# Altium PCB EXP_V111.PcbDoc (part 2 of 4)
Units mm, origin at the board's own origin, x right, y up, seen from the top; angles counter-clockwise.
Board outline 86 x 86 mm, 4 copper layers (Top Layer, Mid-Layer 1, Mid-Layer 2, Bottom Layer), stack 1.584 mm thick; 341 components, 287 nets, 1185 pads, 999 vias.
Unrouted connection lines stored in the file: 255.
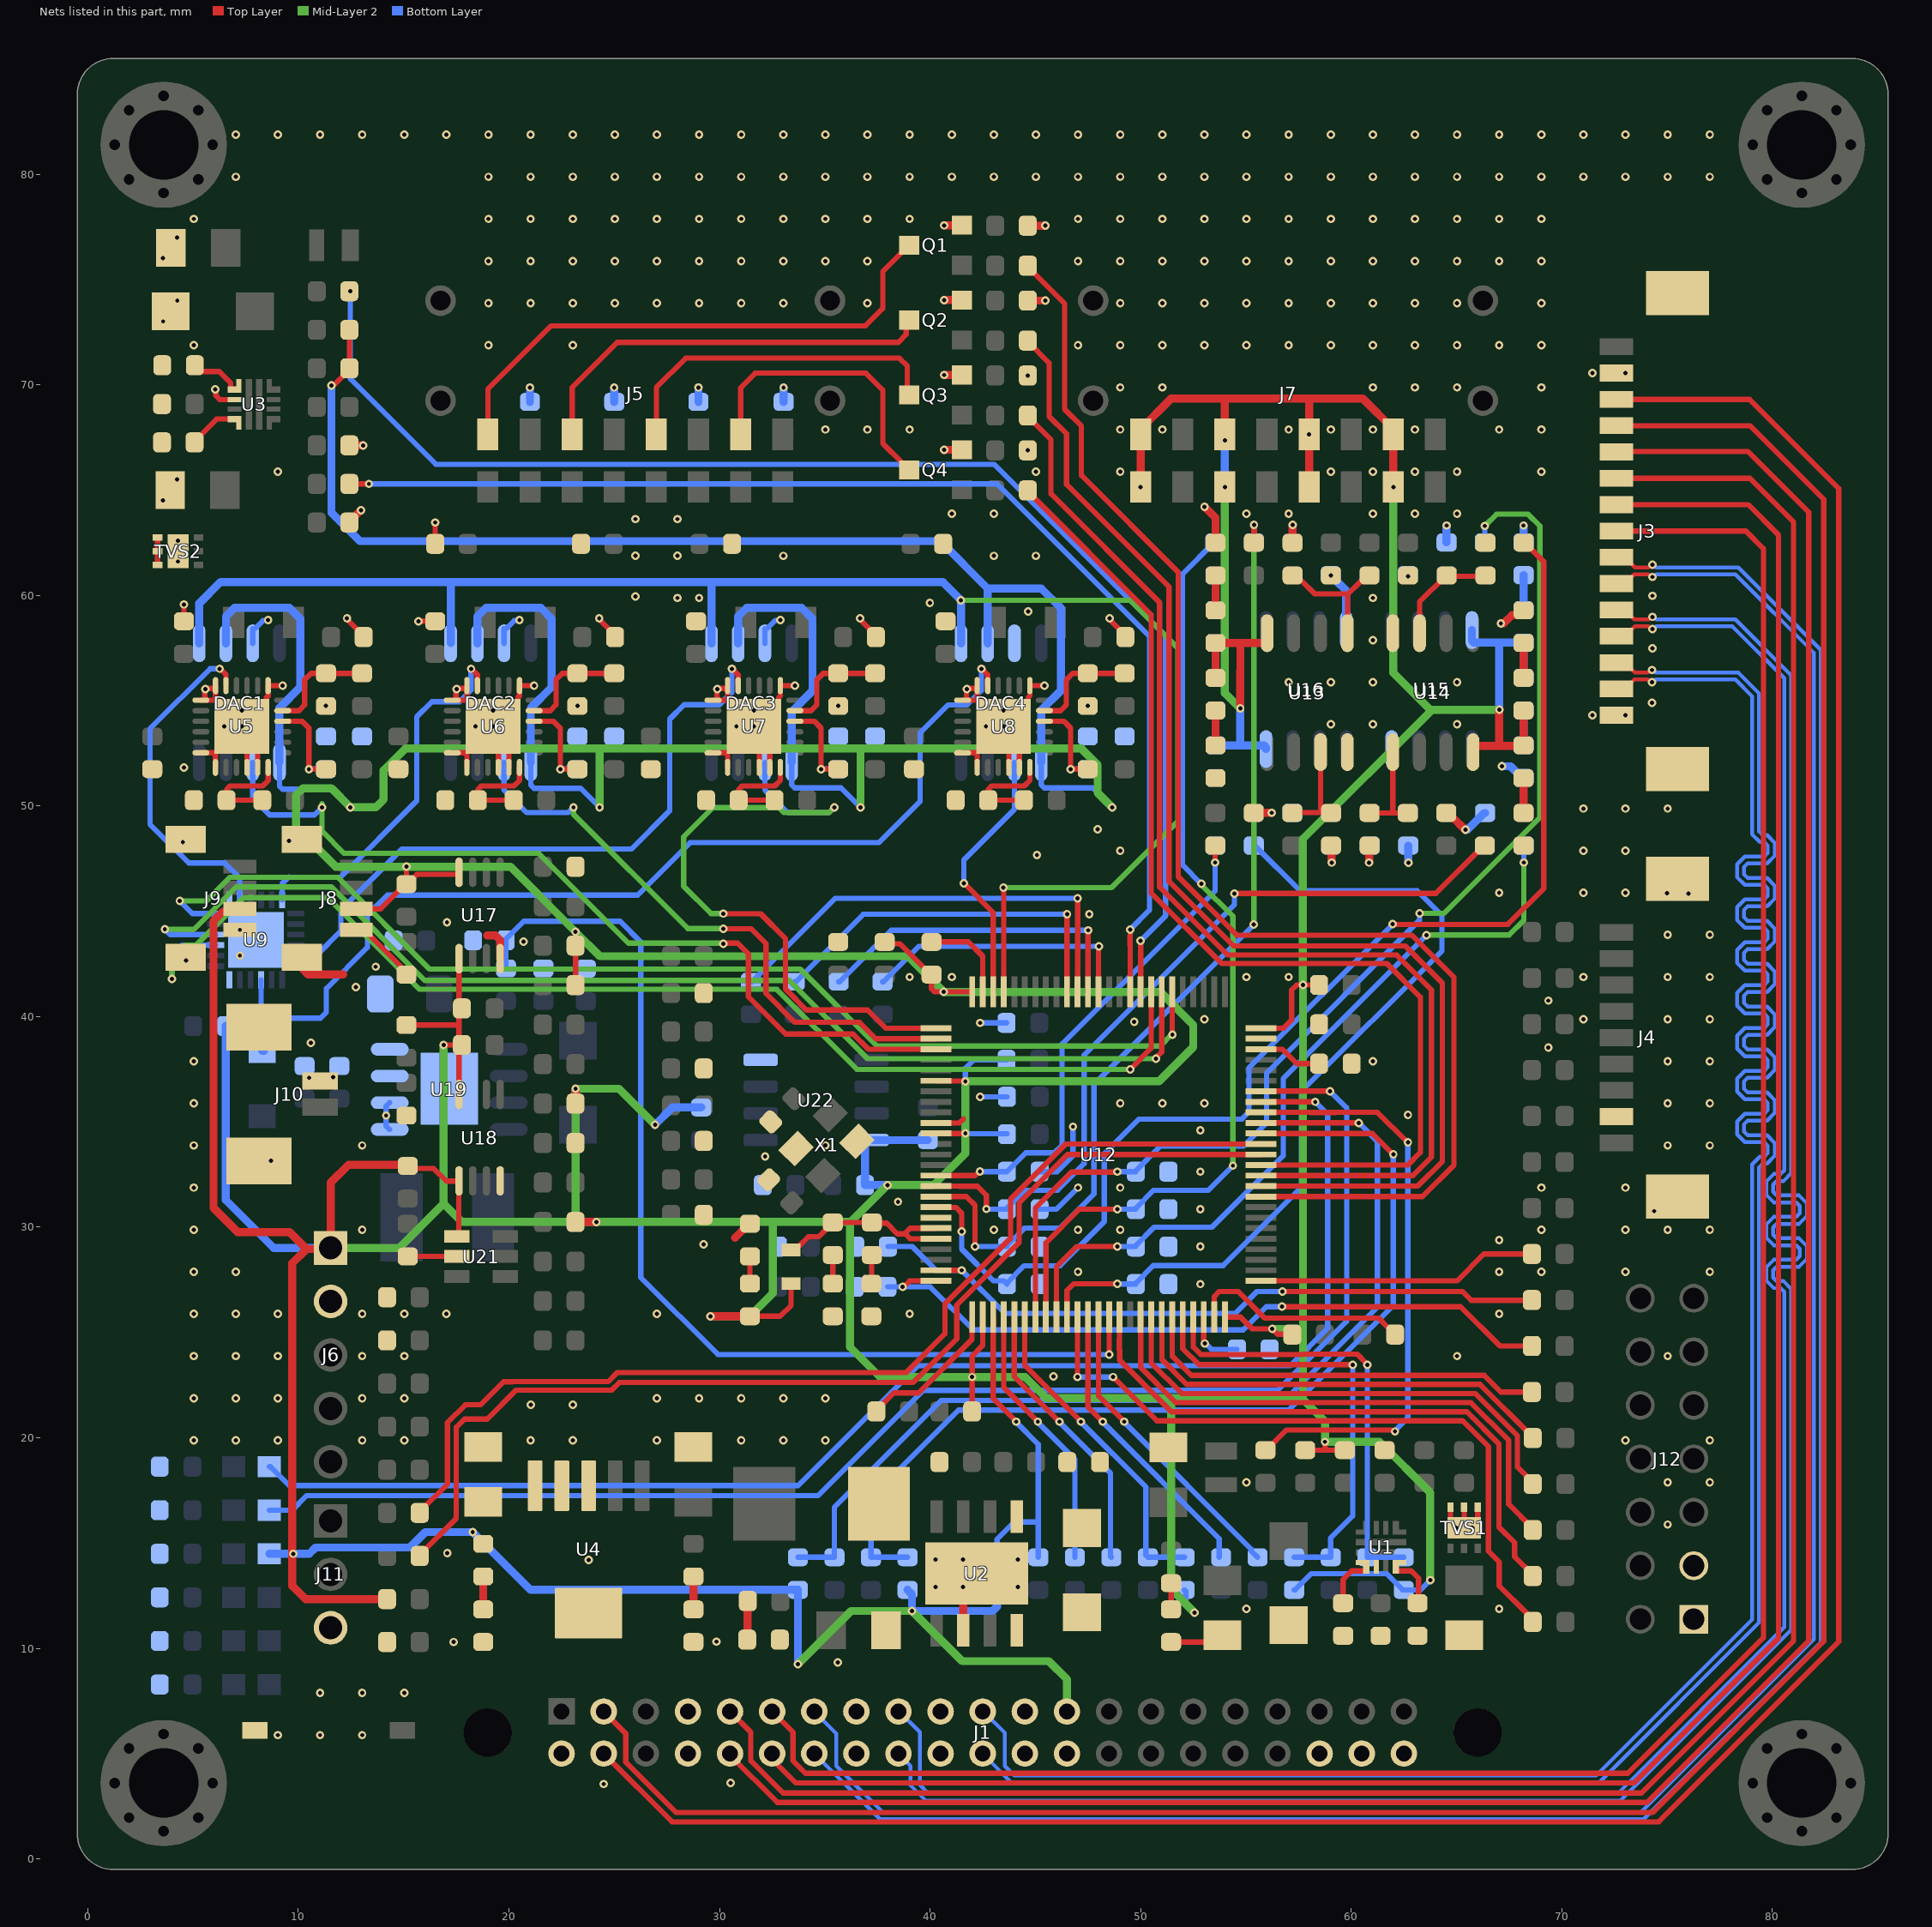
[diagram p4: the nets of this part, all layers, seen from the top]

## Via types
v1: diameter 0.4, hole 0.2, Top Layer to Bottom Layer, tented both sides, 998 vias
v2: diameter 0.4, hole 0.2, Top Layer to Bottom Layer, 1 vias

## Nets (pads, with @x,y where several pads share a name; then routed paths per layer and width w, separated by ;. In a path a pad name is that pad's centre, name@x,y a point inside that pad or via, vN(x,y) a via of type N, cw(c..) or ccw(c..) an arc to the next point about the centre after c; other vN are vias at no path point) (continued)
+3.3: C18.1 C19.2 C77.2 C85.2 C86.2 C93.2 C94.2 C101.2 C102.2 C109.2 C110.2 C117.2 C118.2 C126.2 C127.2 C128.2 C136.2 C137.2 C138.2 C143.2 C155.2 DAC1.1 DAC1.6 DAC2.1 DAC2.6 DAC3.1 DAC3.6 DAC4.1 DAC4.6 DS4.1 J1.13 J6.1 J7.1 J7.3 J7.5 J7.7 J7.9 J7.11 J7.13 J7.15 J8.2 J9.2 L7.1 R3.1 R14.1 R38.1 R40.1 R41.1 R42.1 R43.1 R44.1 R90.1 R91.1 R92.1 R93.1 R99.1 R100.1 R110.1 R135.1 R139.1 R140.1 R149.1 R153.2 R155.1 U4.4 U4.5 U12.6 U12.11 U12.27 U12.50 U12.75 U12.100 U13.8 U14.8 U15.8 U16.8 U17.1 U17.8 U18.1 U18.8 U21.1 U22.8 | length 643.9
  Top Layer w0.254: v1(11.567,69.975) 11.594,70.003 11.699,70.003 12.384,70.688 12.423,70.688 R149.1@12.423,70.784 R14.1@12.423,72.589 ; J8.2@12.748,45.118 13.906,45.118 15.081,46.293 C117.2@15.131,46.293 ; C118.2@15.131,39.599 17.549,39.599 ; v1(15.131,47.118) C117.2@15.131,46.293 ; C143.2@15.194,32.906 15.317,32.783 16.432,32.783 17.033,32.182 U18.1@17.613,32.182 ; v1(16.896,38.653) 16.9,38.649 R91.1@17.631,38.649 ; U21.1@17.532,29.559 17.613,29.64 U18.1@17.613,32.182 ; 17.629,39.547 17.629,40.248 R90.1@17.767,40.386 ; U18.1@17.631,32.2 U18.1@17.613,32.182 ; U18.8@17.631,36.3 R91.1@17.631,38.649 ; 17.631,39.518 R91.1@17.631,38.649 ; R90.1@17.631,40.386 U17.1@17.631,42.752 ; U17.8@17.631,46.852 17.586,46.808 17.586,46.75 15.628,46.75 15.171,46.293 C117.2@15.131,46.293 ; R91.1@17.767,38.649 R91.1@17.631,38.649 ; R93.1@23.163,41.493 R92.1@23.163,43.367 v1(23.163,44.021) ; C77.2@31.445,25.767 32.88,25.767 33.401,26.288 L7.1@33.401,27.317 ; R38.1@37.847,43.545 37.931,43.461 38.554,43.461 40.02,41.995 C128.2@40.07,41.995 40.07,41.32 40.219,41.172 v1(40.647,41.172) U12.100@42,41.172 ; U12.11@40.278,34.45 v1(41.675,34.45) ; U12.6@40.278,36.95 40.291,36.938 41.662,36.938 v1(41.675,36.925) ; C138.2@41.998,21.25 v1(41.998,22.883) 41.998,23.887 42.5,24.388 U12.27@42.5,25.728 ; U12.50@54,25.728 54.738,25.728 55.295,25.171 v1(56.253,25.171) 56.507,24.918 C136.2@57.004,24.918 ; U12.75@55.722,39.45 56.784,39.45 57.175,39.841 57.175,41.266 57.409,41.5 C126.2@58.475,41.5 ; R3.1@57.814,19.409 58.758,19.409 ; v1(58.758,19.806) 58.758,19.409 ; R135.1@59.701,19.409 58.758,19.409
  Top Layer w0.381: J9.2@7.221,45.118 7.082,44.978 6.401,44.978 5.969,44.546 5.969,30.912 7.112,29.769 9.575,29.769 10.383,28.96 ; 13.445,32.963 13.442,32.96 13.434,32.96 13.431,32.964 12.383,32.964 11.532,32.113 J6.1@11.532,29.012 11.48,28.96 10.383,28.96 ; 13.452,32.956 15.144,32.956 C143.2@15.194,32.906 ; R110.1@14.211,12.335 10.345,12.335 9.709,12.97 9.709,28.286 10.383,28.96 ; R99.1@23.163,30.246 v1(24.157,30.246) ; R100.1@23.163,35.869 v1(23.165,36.571) v1(23.165,36.571) ; v1(29.566,25.767) C77.2@31.445,25.767 ; v1(50,65.15) J7.9@50,67.65 50,67.9 51.442,69.342 54,69.342 ; C86.2@53.554,56.083 C85.2@53.554,57.74 54.73,57.74 ; J7.11@54,67.65 54,69.342 ; v1(54.731,54.632) 54.734,54.634 54.734,56.411 54.737,56.413 54.737,57.733 54.73,57.74 ; U13.8@56.007,58.206 56.007,57.841 55.906,57.74 54.73,57.74 ; J7.5@58,65.15 v1(58,67.65) 58,69.342 ; v1(62,65.15) J7.15@62,67.65 62,67.9 60.558,69.342 58,69.342 ; U14.8@65.786,52.557 65.786,52.753 65.887,52.855 67.025,52.855 ; v1(67.034,54.569) 67.034,53.714 67.025,53.705 67.025,52.855 ; C93.2@68.186,54.533 C94.2@68.186,52.877 68.164,52.855 67.025,52.855 ; 54,69.342 58,69.342
  Mid-Layer 2 w0.381: J6.1@11.532,29.012 14.788,29.012 16.896,31.12 ; v1(16.896,38.653) 16.896,31.12 ; v1(24.308,49.936) 24.308,52.717 24.3,52.725 ; v1@26.932,34.862 25.223,36.571 v1(23.165,36.571) 23.165,30.296 23.114,30.246 ; v1(29.566,25.767) 31.445,25.767 32.537,26.86 32.537,30.246 ; v1(33.723,9.246) 36.249,11.772 v1(39.146,11.772) 41.526,9.392 45.638,9.392 46.5,8.529 J1.13@46.5,7 ; v1(36.694,49.936) 36.694,52.717 36.687,52.725 ; v1(41.675,36.925) v1(41.675,34.45) 41.675,33.502 40.172,31.999 v1(37.975,31.999) 36.201,30.225 ; v1@41.68,36.925 50.874,36.925 52.5,38.551 52.5,39.6 50.929,41.172 v1(40.647,41.172) 38.954,42.864 24.32,42.864 v1(23.163,44.021) 20.066,47.118 v1(15.131,47.118) 11.77,47.118 9.894,48.994 9.894,50.51 10.227,50.844 11.564,50.844 12.466,49.942 12.471,49.942 v1(12.471,49.936) 13.674,49.936 14.05,50.312 14.05,51.694 15.081,52.725 24.3,52.725 ; v1(48.647,49.936) 47.957,50.626 47.957,51.956 47.188,52.725 36.687,52.725 ; v1(52.565,11.691) 51.456,12.8 51.456,21.883 ; v1(54,65.15) 54,55.363 v1(54.731,54.632) ; v1(56.253,25.171) 57.709,25.171 ; v1(57.705,41.504) 57.705,48.437 63.755,54.487 63.755,54.569 ; v1@57.709,41.496 57.709,25.171 ; v1(62,65.15) 62,56.324 63.755,54.569 ; v1(63.754,13.233) 63.754,17.397 61.345,19.806 v1(58.758,19.806) 58.758,20.771 57.645,21.883 ; v1(67.034,54.569) 63.755,54.569 ; 16.896,31.12 17.771,30.246 23.114,30.246 ; 23.114,30.246 v1(24.157,30.246) 32.537,30.246 ; 24.3,52.725 36.687,52.725 ; 32.537,30.246 36.18,30.246 36.201,30.225 ; 36.201,30.225 36.201,24.302 37.62,22.883 v1(41.998,22.883) 44.517,22.883 45.517,21.883 51.456,21.883 ; 51.456,21.883 57.645,21.883 ; 57.645,21.883 57.709,21.947 57.709,25.171
  Bottom Layer w0.254: DAC1.1@9.102,52.075 9.102,50.949 9.251,50.8 11.608,50.8 v1(12.471,49.936) ; DAC2.1@21.04,52.075 21.04,50.991 21.189,50.842 23.402,50.842 v1(24.308,49.936) ; DAC3.1@33.427,52.075 33.427,51.008 33.576,50.859 35.772,50.859 v1(36.694,49.936) ; v1(41.675,34.45) 41.693,34.432 C127.2@43.652,34.432 ; v1(41.675,36.925) 41.675,37.546 42.075,37.946 C137.2@43.632,37.946 ; DAC4.1@45.278,52.075 45.278,51.008 45.426,50.859 47.724,50.859 v1(48.647,49.936) ; R40.1@52.084,12.774 52.139,12.719 52.139,12.117 v1(52.565,11.691) ; R42.1@57.292,12.774 57.342,12.774 58.117,13.549 61.675,13.549 62.45,12.774 R43.1@62.5,12.774 63.295,12.774 v1(63.754,13.233)
  Bottom Layer w0.381: R153.2@6.553,39.55 6.553,31.293 8.834,29.012 J6.1@11.532,29.012 ; DAC1.6@6.562,57.725 6.562,59.005 6.968,59.411 9.574,59.411 10.092,58.892 10.092,55.649 9.102,54.659 DAC1.1@9.102,52.075 ; DS4.1@8.623,14.488 v1(9.754,14.488) 9.757,14.492 10.524,14.492 10.82,14.787 15.295,14.787 16.027,15.519 v1(18.278,15.519) 21.023,12.774 R41.1@33.723,12.774 v1(33.723,9.246) ; v1(11.567,69.975) 11.567,63.933 12.925,62.575 40.493,62.575 42.738,60.33 ; DAC2.6@18.5,57.725 18.5,59.005 18.906,59.411 21.512,59.411 22.03,58.892 22.03,55.645 21.04,54.655 DAC2.1@21.04,52.075 ; v1(26.936,34.858) 27.76,35.682 R139.1@29.13,35.682 ; DAC3.6@30.887,57.725 30.887,59.005 31.293,59.411 33.899,59.411 34.417,58.892 34.417,55.466 33.427,54.476 DAC3.1@33.427,52.075 ; v1(37.975,31.999) C155.2@36.911,31.999 36.911,34.028 37.016,34.132 U22.8@37.222,34.132 R140.1@39.896,34.132 ; R44.1@38.931,12.774 39.142,12.563 39.142,11.776 v1(39.146,11.772) 42.965,11.772 43.188,11.995 R155.1@43.188,12.765 ; DAC4.6@42.738,57.725 42.738,60.33 ; DAC4.1@45.278,52.075 45.278,54.55 46.223,55.495 46.223,59.391 45.283,60.33 42.738,60.33 ; C109.2@53.554,54.543 C110.2@53.554,52.882 54.731,52.882 ; v1(54,65.15) v1(54,67.359) ; v1(54.731,54.632) 54.731,52.882 ; U16.8@55.954,52.703 55.954,52.78 55.853,52.882 54.731,52.882 ; U15.8@65.733,58.353 65.733,57.856 65.835,57.755 67.034,57.755 ; v1(67.034,54.569) 67.034,57.755 ; C102.2@68.186,56.093 C101.2@68.186,57.755 67.034,57.755
ADC_TEMP1: C92.2 R66.2 U12.15 | length 23.8
  Top Layer w0.254: U12.15@40.278,32.45 42.139,32.45 42.328,32.639 v1(42.367,32.639) ; v1(53.542,47.317) R66.2@53.542,48.12
  Bottom Layer w0.254: v1(42.367,32.639) 42.372,32.634 C92.2@43.652,32.634 43.652,32.638 43.996,32.982 44,32.982 44.546,33.528 45.898,33.528 46.272,33.902 46.272,38.703 53.542,45.973 v1(53.542,47.317)
ADC_TEMP2: C98.2 R72.2 U12.16 | length 37.2
  Top Layer w0.254: U12.16@40.278,31.95 41.396,31.95 41.401,31.945 42.248,31.945 42.672,31.521 v1(42.672,30.861) ; 54.66,45.847 64.021,45.847 66.294,48.12 R72.2@66.344,48.12
  Bottom Layer w0.254: v1(42.672,30.861) 42.678,30.855 C98.2@43.652,30.855 43.652,30.905 44.497,31.75 46.05,31.75 47.315,33.015 47.315,38.171 54.458,45.314 v1(54.458,45.844)
ADC_TEMP3: C91.2 R67.2 U12.17 | length 46.5
  Top Layer w0.254: U12.17@40.278,31.45 41.725,31.45 42.139,31.036 v1(42.139,29.076) ; R67.2@55.374,62.497 55.378,62.501 55.378,63.351 v1(55.382,63.355)
  Mid-Layer 2 w0.254: v1(55.374,44.371) 55.378,44.375 55.378,63.351 v1(55.382,63.355)
  Bottom Layer w0.254: v1(42.139,29.076) C91.2@43.652,29.076 43.652,29.126 44.479,29.953 46.158,29.953 47.781,31.576 47.781,36.778 v1(55.374,44.371)
ADC_TEMP4: C100.2 R73.2 U12.18 | length 59.2
  Top Layer w0.254: U12.18@40.278,30.95 40.291,30.937 41.224,30.937 41.504,30.658 v1(41.504,29.794) ; v1@61.97,44.371 61.974,44.375 67.442,44.375 69.147,46.079 69.147,61.599 68.248,62.497 R73.2@68.198,62.497
  Bottom Layer w0.254: v1(41.504,29.794) 41.504,28.958 43.005,27.457 43.492,27.457 C100.2@43.652,27.297 43.652,27.347 44.474,28.169 46.177,28.169 48.271,30.263 48.271,33.489 49.915,35.132 54.817,35.132 55.143,35.458 55.143,37.562 v1(61.97,44.389)
ADC_TEMP5: C106.2 R78.2 U12.32 | length 56.1
  Top Layer w0.254: U12.32@45,25.728 45,30.903 46.711,32.614 48.87,32.614 48.89,32.634 v1(48.892,32.634)
  Mid-Layer 2 w0.254: v1(63.246,44.907) 64.414,44.907 68.961,49.454 68.961,63.297 68.402,63.856 66.9,63.856 v1(66.345,63.3)
  Bottom Layer w0.254: v1(48.892,32.634) C106.2@49.772,32.634 49.772,32.684 50.946,33.858 54.889,33.858 55.983,34.952 55.983,37.314 63.246,44.577 v1(63.246,44.907) ; R78.2@66.345,62.517 v1(66.345,63.3)
ADC_TEMP6: C114.2 R84.2 U12.33 | length 45.2
  Top Layer w0.254: U12.33@45.5,25.728 45.5,29.262 47.093,30.855 v1(48.892,30.855)
  Mid-Layer 2 w0.254: v1(52.883,46.304) 52.883,46.265 54.381,44.766 v1(54.381,32.918)
  Bottom Layer w0.254: v1(48.892,30.855) C114.2@49.772,30.855 49.772,30.905 50.617,31.75 53.213,31.75 v1(54.381,32.918) ; v1(52.883,46.304) 51.994,47.193 51.994,61.018 53.492,62.517 R84.2@53.542,62.517
ADC_TEMP7: C108.2 R80.2 U12.34 | length 37.1
  Top Layer w0.254: U12.34@46,25.728 46,28.118 46.965,29.083 v1(48.89,29.083)
  Mid-Layer 2 w0.254: v1(63.581,43.87) 67.504,43.87 68.198,44.564 68.198,47.25 v1@68.194,47.254
  Bottom Layer w0.254: v1(48.89,29.083) 48.894,29.08 49.769,29.08 C108.2@49.772,29.076 ; C108.2@49.772,29.126 50.644,29.998 53.391,29.998 56.772,33.378 56.772,37.061 v1(63.581,43.87) ; v1@68.119,47.317 68.198,47.397 R80.2@68.198,48.12
  other v1: 68.198,47.317
ADC_TEMP8: C116.2 R85.2 U12.35 | length 40.5
  Top Layer w0.254: U12.35@46.5,25.728 46.5,26.993 46.812,27.305 v1(48.892,27.305)
  Bottom Layer w0.254: v1(48.892,27.305) 48.896,27.301 49.768,27.301 C116.2@49.772,27.297 49.772,27.347 50.602,28.177 53.919,28.177 57.625,31.883 57.625,36.439 64.313,43.127 64.313,44.798 63.137,45.974 57.57,45.974 55.424,48.12 R85.2@55.374,48.12
ADG_CS: U9.21 U12.83 | length 58.5
  Top Layer w0.254: v1@49.507,37.501 50.498,38.492 U12.83@50.498,41.164
  Mid-Layer 2 w0.254: v1(3.992,41.792) 3.992,42.755 4.631,43.395 5.146,43.395 7.395,45.644 11.405,45.644 15.755,41.294 32.722,41.294 36.522,37.494 v1(49.5,37.494)
  Bottom Layer w0.254: v1(3.992,41.792) 3.992,42.885 4.502,43.395 U9.21@6.075,43.395
ADG_IOMOSI: U9.24 U12.81 | length 55.1
  Top Layer w0.254: v1@51.5,39.153 U12.81@51.5,41.172
  Mid-Layer 2 w0.254: v1(4.369,45.491) 5.623,45.491 6.747,46.616 11.871,46.616 16.23,42.256 33.829,42.256 37.486,38.6 50.93,38.6 51.472,39.141 v1(51.511,39.141)
  Bottom Layer w0.254: v1(4.369,45.491) 4.965,44.895 U9.24@6.075,44.895
ADG_IOSCK: U9.22 U12.82 | length 57.1
  Top Layer w0.254: v1(50.724,38.004) 50.724,38.043 51.001,38.32 U12.82@51.001,41.171
  Mid-Layer 2 w0.254: v1(3.658,44.145) 5.037,44.145 7.043,46.152 11.57,46.152 16.006,41.716 33.314,41.716 37.03,38 50.721,38 v1(50.724,38.004)
  Bottom Layer w0.254: v1(3.658,44.145) 3.908,43.895 U9.22@6.075,43.895
CAM_CK_N: J1.7 J3.6 | length 111.6
  Top Layer w0.18: J3.6@72.6,60.56 73,60.56 73.44,61 73.739,61 74.12,61 74.244,60.876 v1(74.303,60.876)
  Bottom Layer w0.18: J1.7@34.5,7 35.551,5.949 35.551,4.417 37.756,2.212 73.756,2.212 81.966,10.422 81.966,57.284 78.25,61 74.487,61
CAM_CK_P: J1.28 J3.7 | length 111.1
  Top Layer w0.18: J3.7@72.6,61.81 73,61.81 73.48,61.33 73.876,61.33 74.12,61.33 74.244,61.454 v1(74.303,61.454)
  Bottom Layer w0.18: J1.28@34.5,5 34.501,5 37.62,1.882 73.893,1.882 82.296,10.285 82.296,57.421 78.387,61.33 74.487,61.33
CAM_D0_N: J1.11 J3.2 | length 109.3
  Top Layer w0.18: J3.2@72.6,55.56 73,55.56 73.448,56.008 74.096,56.008 74.222,55.882 v1(74.282,55.882)
  Bottom Layer w0.18: J1.11@42.5,7 42.536,7 43.546,5.99 43.546,4.408 44.002,3.952 71.632,3.952 79.045,11.365 79.045,31.808 79.045,32.982 79.41,33.348 79.613,33.348 79.784,33.52 79.784,33.864 79.613,34.036 78.692,34.036 78.327,34.401 78.327,35.018 78.692,35.384 79.613,35.384 79.784,35.556 79.784,35.9 79.613,36.072 78.692,36.072 78.327,36.437 78.327,37.054 78.692,37.42 79.613,37.42 79.784,37.592 79.784,37.936 79.613,38.108 78.692,38.108 78.327,38.473 78.327,39.09 78.692,39.456 79.613,39.456 79.784,39.628 79.784,39.972 79.613,40.144 78.692,40.144 78.327,40.509 78.327,41.126 78.692,41.492 79.613,41.492 79.784,41.664 79.784,42.008 79.613,42.18 78.692,42.18 78.327,42.545 78.327,43.162 78.692,43.528 79.613,43.528 79.784,43.7 79.784,44.044 79.613,44.216 78.692,44.216 78.327,44.581 78.327,45.198 78.692,45.564 79.613,45.564 79.784,45.736 79.784,46.08 79.613,46.252 78.692,46.252 78.327,46.617 78.327,47.234 78.692,47.6 79.613,47.6 79.784,47.772 79.784,48.116 79.613,48.288 79.41,48.288 79.045,48.653 79.045,48.976 79.045,55.205 78.244,56.006 74.465,56.006
CAM_D0_P: J1.32 J3.3 | length 108.8
  Top Layer w0.18: J3.3@72.6,56.81 73,56.81 73.472,56.338 74.101,56.338 74.222,56.46 v1(74.282,56.46)
  Bottom Layer w0.18: J1.32@42.5,5 42.5,4.987 43.865,3.622 71.769,3.622 79.375,11.229 79.375,31.808 79.375,32.846 79.547,33.018 79.749,33.018 80.114,33.383 80.114,34 79.749,34.366 78.829,34.366 78.657,34.538 78.657,34.882 78.829,35.054 79.749,35.054 80.114,35.419 80.114,36.036 79.749,36.402 78.829,36.402 78.657,36.574 78.657,36.918 78.829,37.09 79.749,37.09 80.114,37.455 80.114,38.072 79.749,38.438 78.829,38.438 78.657,38.61 78.657,38.954 78.829,39.126 79.749,39.126 80.114,39.491 80.114,40.108 79.749,40.474 78.829,40.474 78.657,40.646 78.657,40.99 78.829,41.162 79.749,41.162 80.114,41.527 80.114,42.144 79.749,42.51 78.829,42.51 78.657,42.682 78.657,43.026 78.829,43.198 79.749,43.198 80.114,43.563 80.114,44.18 79.749,44.546 78.829,44.546 78.657,44.718 78.657,45.062 78.829,45.234 79.749,45.234 80.114,45.599 80.114,46.216 79.749,46.582 78.829,46.582 78.657,46.754 78.657,47.098 78.829,47.27 79.749,47.27 80.114,47.635 80.114,48.252 79.749,48.618 79.547,48.618 79.375,48.79 79.375,48.976 79.375,55.342 78.381,56.336 74.465,56.336
CAM_D1_N: J1.9 J3.4 | length 108.8
  Top Layer w0.18: J3.4@72.6,58.06 73,58.06 73.473,58.533 74.114,58.533 74.244,58.403 v1(74.303,58.403)
  Bottom Layer w0.18: J1.9@38.5,7 38.533,7 39.517,6.016 39.517,3.51 39.929,3.099 72.659,3.099 80.569,11.009 80.569,26.745 80.569,26.932 80.397,27.104 80.07,27.104 79.705,27.469 79.705,28.087 80.07,28.452 81.134,28.452 81.306,28.624 81.306,28.968 81.134,29.14 80.07,29.14 79.705,29.505 79.705,30.123 80.07,30.488 81.134,30.488 81.306,30.66 81.306,31.004 81.134,31.176 80.07,31.176 79.705,31.541 79.705,32.159 80.07,32.524 80.397,32.524 80.569,32.696 80.569,33.334 80.569,56.068 78.109,58.527 74.487,58.527
CAM_D1_P: J1.30 J3.5 | length 108.3
  Top Layer w0.18: J3.5@72.6,59.31 73,59.31 73.447,58.863 74.126,58.863 74.244,58.981 v1(74.303,58.981)
  Bottom Layer w0.18: J1.30@38.5,5 38.5,4.991 39.076,4.416 39.076,3.485 39.792,2.769 72.795,2.769 80.899,10.872 80.899,26.745 80.899,27.069 80.534,27.434 80.207,27.434 80.035,27.606 80.035,27.95 80.207,28.122 81.271,28.122 81.636,28.487 81.636,29.105 81.271,29.47 80.207,29.47 80.035,29.642 80.035,29.986 80.207,30.158 81.271,30.158 81.636,30.523 81.636,31.141 81.271,31.506 80.207,31.506 80.035,31.678 80.035,32.022 80.207,32.194 80.534,32.194 80.899,32.559 80.899,33.334 80.899,56.204 78.246,58.857 74.487,58.857
CAM_IO0: J1.27 J3.9 | length 112.1
  Top Layer w0.254: J1.27@32.5,5 32.5,4.742 33.639,3.603 73.423,3.603 80.295,10.474 80.295,62.865 78.849,64.31 J3.9@72.6,64.31
CAM_IO1: J1.6 J3.8 | length 110.8
  Top Layer w0.254: J1.6@32.5,7 33.485,6.015 33.485,4.664 34.085,4.064 73.14,4.064 79.579,10.503 79.579,62.227 78.746,63.06 J3.8@72.6,63.06
CAM_SCL: J1.5 J3.10 | length 118.3
  Top Layer w0.254: J1.5@30.5,7 31.489,6.011 31.489,4.659 33.018,3.131 73.786,3.131 81.01,10.354 81.01,63.49 78.94,65.56 J3.10@72.6,65.56
CAM_SDA: J1.26 J3.11 | length 119.3
  Top Layer w0.254: J1.26@30.5,5 30.5,4.928 32.748,2.68 74.044,2.68 81.725,10.361 81.725,63.953 78.841,66.837 72.627,66.837 J3.11@72.6,66.81
CM4_SCL: J1.2 J3.12 | length 129.6
  Top Layer w0.254: J1.2@24.5,7 25.553,5.947 25.553,4.597 27.951,2.199 74.308,2.199 82.441,10.332 82.441,64.559 78.94,68.06 J3.12@72.6,68.06
CM4_SDA: J1.23 J3.13 | length 130.6
  Top Layer w0.254: J1.23@24.5,5 27.743,1.757 74.598,1.757 83.156,10.315 83.156,65.08 78.926,69.31 J3.13@72.6,69.31
CONS_UART6_RX: R113.1 U12.64 | length 50.9
  Top Layer w0.254: R113.1@15.761,16.43 15.761,16.48 17.075,17.795 17.075,20.714 17.927,21.565 18.653,21.565 19.74,22.653 20.159,22.653 20.169,22.663 24.708,22.663 25.138,23.093 38.863,23.093 40.705,24.934 40.705,26.351 43.823,29.469 43.823,31.323 46.45,33.95 U12.64@55.722,33.95
CONS_UART6_TX: R114.1 U12.63 | length 52.5
  Top Layer w0.254: R114.1@15.761,14.383 15.761,14.433 17.5,16.172 17.5,20.496 17.889,20.885 18.962,20.885 20.336,22.259 24.875,22.259 25.237,22.621 39.194,22.621 41.267,24.693 41.267,26.303 44.227,29.263 44.227,31.155 46.522,33.45 U12.63@55.722,33.45
DAC_nCS_1: DAC1.2 U12.3 | length 41.4
  Top Layer w0.254: v1(30.175,43.459) 30.203,43.487 30.858,43.487 31.369,42.977 31.369,40.945 33.147,39.167 36.347,39.167 37.064,38.45 U12.3@40.278,38.45
  Mid-Layer 2 w0.254: v1@11.125,50.114 v1(11.125,49.936) 11.125,48.793 12.167,47.752 21.412,47.752 25.679,43.485 30.15,43.485 v1(30.175,43.459)
  Bottom Layer w0.254: DAC1.2@7.832,52.075 7.832,50.381 8.638,49.575 10.764,49.575 v1(11.125,49.936)
DAC_nCS_2: DAC2.2 U12.2 | length 28.5
  Top Layer w0.254: v1@30.175,44.171 31.496,44.171 32.205,43.461 32.205,41.099 33.579,39.726 36.652,39.726 37.428,38.95 U12.2@40.278,38.95
  Mid-Layer 2 w0.254: v1(23.063,49.936) 23.063,49.606 28.493,44.176 30.17,44.176 v1@30.175,44.171
  Bottom Layer w0.254: DAC2.2@19.77,52.075 19.77,50.766 20.853,49.682 22.809,49.682 v1(23.063,49.936)
  other v1: 30.175,44.175
DAC_nCS_3: DAC3.2 U12.1 | length 31.6
  Top Layer w0.254: v1@30.168,44.882 31.953,44.882 33.138,43.697 33.138,41.299 34.127,40.31 37.033,40.31 37.893,39.45 U12.1@40.278,39.45
  Mid-Layer 2 w0.254: v1(30.175,44.89) 29.592,44.89 28.296,46.186 28.296,48.539 29.68,49.924 32.826,49.924 33.067,49.682 35.196,49.682 v1(35.45,49.936)
  Bottom Layer w0.254: DAC3.2@32.157,52.075 32.157,50.766 33.24,49.682 35.196,49.682 v1(35.45,49.936)
DAC_nCS_4: DAC4.2 U12.98 | length 12.5
  Top Layer w0.254: v1(41.606,46.33) 43,44.936 U12.98@43,41.172
  Bottom Layer w0.254: v1(41.606,46.33) 41.606,47.448 44.008,49.849 DAC4.2@44.008,52.075
DAC_nLDAC: DAC1.5 DAC2.5 DAC3.5 DAC4.5 U12.97 | length 80.7
  Top Layer w0.254: v1(43.485,46.123) 43.485,46.076 43.5,46.06 U12.97@43.5,41.172
  Mid-Layer 2 w0.254: v1(41.468,59.772) 49.499,59.772 51.765,57.506 51.765,49.276 48.613,46.123 v1(43.485,46.123)
  Bottom Layer w0.381: DAC1.5@5.292,57.725 5.292,59.623 6.299,60.63 17.247,60.63 ; DAC2.5@17.247,57.742 17.247,60.63 ; DAC3.5@29.617,57.725 29.617,60.63 ; DAC4.5@41.468,57.725 v1(41.468,59.772) 40.61,60.63 29.617,60.63 ; 17.247,60.63 29.617,60.63
EF_5_AUX: R15.2 U12.84 | length 65.6
  Top Layer w0.254: R15.2@12.423,74.445 v1(12.467,74.445) ; U12.84@50,40.961 v1(50,43.6)
  Bottom Layer w0.254: v1(12.467,74.445) 12.467,70.283 16.525,66.225 43.046,66.225 51.181,58.09 51.181,44.781 v1(50,43.6)
EF_5_EN: R13.1 U12.85 | length 58.5
  Top Layer w0.254: R13.1@12.423,65.293 12.424,65.295 13.349,65.295 v1(13.351,65.297) ; U12.85@49.5,40.949 49.5,43.386 49.495,43.391 49.495,43.809 49.5,43.814 v1(49.5,44.129)
  Bottom Layer w0.254: v1(13.351,65.297) 43.188,65.297 50.419,58.066 50.419,45.048 v1(49.5,44.129)
EF_12_AUX: R4.2 U12.67 | length 28.1
  Top Layer w0.254: U12.67@55.722,35.45 58.079,35.45 58.084,35.445 59.253,35.445 59.264,35.456 60.433,35.456 60.439,35.45 61.248,35.45 62.664,34.034 v1(62.693,34.034) ; R4.2@55.927,19.409 55.977,19.409 56.935,20.367 61.93,20.367 61.972,20.326 62.05,20.326 v1(62.078,20.298)
  Bottom Layer w0.254: v1(62.078,20.298) 62.078,20.337 62.693,20.952 v1(62.693,34.034)
EXP_I2C2_SCL: R42.2 R45.1 U12.46 | length 21.2
  Top Layer w0.254: U12.46@52,25.728 52,24.232 52.766,23.467 v1(60.068,23.467)
  Bottom Layer w0.254: R42.2@57.292,14.324 58.928,14.324 R45.1@59.028,14.324 59.028,15.238 60.068,16.278 v1(60.068,23.467)
EXP_I2C2_SDA: R43.2 R47.2 U12.47 | length 21
  Top Layer w0.254: U12.47@52.5,25.728 52.5,24.304 52.851,23.952 57.706,23.952 57.725,23.972 60.277,23.972 60.764,23.485 v1(60.764,23.467)
  Bottom Layer w0.254: v1@60.831,23.52 60.764,23.453 R47.2@60.764,14.324 R43.2@62.5,14.324
EXP_SPI1_CS: R52.1 R155.2 U12.28 | length 15.4
  Top Layer w0.254: U12.28@43,25.728 43,21.857 v1(44.092,20.764)
  Bottom Layer w0.254: R155.2@43.179,14.324 43.179,15.179 44,16 45.14,16 ; v1@44.08,20.752 45.14,19.692 45.14,16 ; R52.1@45.14,14.324 45.14,16
EXP_SPI1_MISO: R53.2 U12.30 | length 13.3
  Top Layer w0.254: U12.30@44,25.728 44,22.908 v1(46.144,20.764)
  Bottom Layer w0.254: v1@46.131,20.752 48.569,18.314 48.569,14.367 R53.2@48.612,14.324
EXP_SPI1_MOSI: R40.2 R51.2 U12.31 | length 15.6
  Top Layer w0.254: U12.31@44.5,25.728 44.5,23.434 v1(47.17,20.764)
  Bottom Layer w0.254: v1@47.157,20.752 50.25,17.659 50.25,14.422 R51.2@50.348,14.324 R40.2@52.084,14.324
EXP_SPI1_SCK: R50.1 U12.29 | length 12.8
  Top Layer w0.254: U12.29@43.5,25.728 43.5,22.382 v1(45.118,20.764)
  Bottom Layer w0.254: v1@45.105,20.752 46.876,18.981 R50.1@46.876,14.324
EXP_UART7_RX: R48.1 U12.37 | length 14
  Top Layer w0.254: U12.37@47.5,25.728 47.5,21.46 v1(48.196,20.764)
  Bottom Layer w0.254: v1@48.183,20.752 53.729,15.206 R48.1@53.729,14.324
EXP_UART7_TX: R49.2 U12.38 | length 14.5
  Top Layer w0.254: U12.38@48,25.728 48,21.986 v1(49.222,20.764)
  Bottom Layer w0.254: v1@49.209,20.752 55.261,14.7 55.261,14.615 55.552,14.324 R49.2@55.556,14.324
FRAM_CS: R141.1 U12.88 | length 13.1
  Top Layer w0.254: U12.88@48,41.172 v1@48,43.323
  Bottom Layer w0.254: R141.1@37.744,41.657 37.794,41.657 39.476,43.338 v1(48.015,43.338)
FRAM_SPI6_MISO: R144.1 U12.90 | length 21.6
  Top Layer w0.254: U12.90@47.008,41.18 47.008,43.888 47.007,43.889 47.007,44.477 47.01,44.48 47.01,45.068 47.008,45.069 v1(47.008,45.618)
  Bottom Layer w0.254: R144.1@31.492,41.657 31.542,41.657 35.503,45.618 v1(47.008,45.618)
FRAM_SPI6_MOSI: R143.1 U12.91 | length 17.9
  Top Layer w0.254: U12.91@46.5,41.172 v1@46.5,44.853
  Bottom Layer w0.254: R143.1@33.576,41.657 33.626,41.657 36.828,44.858 v1(46.505,44.858)
FRAM_SPI6_SCK: R142.1 U12.89 | length 15.8
  Top Layer w0.254: U12.89@47.5,41.172 v1@47.5,44.087
  Bottom Layer w0.254: R142.1@35.66,41.657 35.71,41.657 38.152,44.098 v1(47.512,44.098)
GND: BT1.1 C1.2 C2.2 C3.1 C4.1 C8.2 C9.2 C10.1 C11.1 C12.2 C13.2 C14.1 C15.1 C17.2 C18.2 C20.1 C21.1 C22.1 C23.1 C24.1 C25.1 C26.1 C27.1 C28.1 C29.1 C30.1 C31.1 C32.1 C33.1 C34.1 C35.1 C36.1 C37.1 C38.1 C39.1 C40.1 C41.1 C42.1 C43.1 C44.1 C45.1 C46.1 C78.1 C79.1 C80.1 C81.1 C82.1 C83.1 C84.1 C87.1 C88.1 C89.1 C90.1 C91.1 C92.1 C95.1 C96.1 C97.1 C98.1 C99.1 C100.1 C103.1 C104.1 C105.1 C106.1 C107.1 C108.1 C111.1 C112.1 C113.1 C114.1 C115.1 C116.1 C119.1 C120.1 C121.1 C122.1 C125.1 C128.1 C129.1 C130.1 C139.1 C144.1 C145.1 C146.1 C148.1 C149.1 C150.2 C151.1 C152.1 C153.1 C154.1 C156.1 D1.2 D2.2 D3.2 DAC1.7 DAC2.7 DAC3.7 DAC4.7 J1.34 J1.40 J1.41 J1.42 J3.S1 J3.S2 J4.2 J4.S1 J4.S2 J6.2 J8.1 J8.5 J8.6 J9.1 J9.5 J9.6 J10.S1 J10.S2 J11.3 J12.01 J12.03 Q1.3 Q2.3 Q3.3 Q4.3 R5.2 R6.2 R7.2 R10.2 R11.2 R16.2 R17.2 R18.2 R19.2 R20.2 R27.2 R28.2 R29.2 R30.2 R35.2 R36.2 R46.2 R62.1 R63.1 R64.1 R65.1 R70.2 R71.2 R76.2 R77.2 R82.2 R83.2 R88.2 R89.2 R98.2 R101.2 R104.1 R108.1 R109.1 R111.2 R112.2 R136.2 R137.2 R138.2 R145.2 R151.2 R152.2 TVS1.1 TVS1.2 TVS1.3 TVS1.7 TVS2.1 TVS2.2 TVS2.3 TVS2.7 U1.8 U2.6 U2.9 U3.8 U4.3 U4.6 U5.7 U5.12 U5.13 U5.18 U5.19 U5.22 U5.23 U5.25 U6.7 U6.12 U6.13 U6.18 U6.19 U6.22 U6.23 U6.25 U7.7 U7.12 U7.13 U7.18 U7.19 U7.22 U7.23 U7.25 U8.7 U8.12 U8.13 U8.18 U8.19 U8.22 U8.23 U8.25 U9.1 U9.18 U9.HTAB U12.10 U12.19 U12.26 U12.49 U12.74 U12.99 U13.4 U14.4 U15.4 U16.4 U17.4 U18.4 U19.1 U19.2 U19.EPAD U21.2 U22.4 X1.2 X1.4 | length 152.1
  Top Layer w0.254: TVS2.3@3.313,61.45 TVS2.2@3.313,62.1 TVS2.1@3.313,62.75 ; C24.1@4.562,58.775 v1(4.562,59.572) ; U5.18@5.369,52.525 U5.25@6.062,52.525 ; U5.13@5.369,55.025 U5.13@5.55,55.025 ; v1(6.05,69.78) 6.078,69.752 6.078,69.487 6.264,69.301 U3.8@6.772,69.301 ; U5.19@6.062,51.832 U5.25@6.062,52.525 ; U5.12@6.062,55.718 U5.12@6.062,55.578 ; U5.22@7.562,51.832 7.562,53.102 7.774,53.314 v1(7.312,53.775) ; U5.25@7.824,53.364 8.062,53.125 U5.23@8.062,51.832 ; v1(9.255,55.718) U5.7@8.562,55.718 8.562,55.222 8.485,55.145 8.485,54.948 v1(7.312,53.775) ; v1(12.31,58.906) 12.31,58.867 13.062,58.114 C26.1@13.062,58.025 ; J8.1@12.748,44.118 13.193,44.118 13.396,43.915 13.396,43.85 14.836,42.41 14.836,42.288 15.127,41.996 C119.1@15.131,41.996 ; C148.1@15.194,28.609 U21.2@17.531,28.609 ; v1(15.703,58.775) C25.1@16.5,58.775 ; C32.1@16.5,62.45 v1(16.5,63.463) ; U6.18@17.307,52.525 U6.25@18,52.525 ; U6.13@17.307,55.025 U6.13@17.487,55.025 ; U6.19@18,51.832 U6.25@18,52.525 ; U6.12@18,55.718 U6.12@18,55.578 ; U6.22@19.5,51.832 19.5,53.102 19.711,53.314 v1(19.25,53.775) ; U6.25@19.761,53.364 20,53.125 U6.23@20,51.832 ; v1(21.193,55.718) U6.7@20.5,55.718 20.5,55.222 20.423,55.145 20.423,54.948 v1(19.25,53.775) ; v1(24.285,58.906) 24.285,58.867 25.037,58.114 C27.1@25.037,58.025 ; U7.18@29.694,52.525 U7.25@30.387,52.525 ; U7.13@29.694,55.025 U7.13@29.874,55.025 ; U7.19@30.387,51.832 U7.25@30.387,52.525 ; U7.12@30.387,55.718 U7.12@30.387,55.578 ; U7.22@31.887,51.832 31.887,53.102 32.098,53.314 v1(31.637,53.775) ; U7.25@32.148,53.364 32.387,53.125 U7.23@32.387,51.832 ; v1(33.58,55.718) U7.7@32.887,55.718 32.887,55.222 32.81,55.145 32.81,54.948 v1(31.637,53.775) ; v1(36.672,58.906) 36.672,58.867 37.424,58.114 C38.1@37.424,58.025 ; C146.1@37.449,21.25 37.449,21.3 38.273,22.124 39.448,22.124 41.987,24.663 41.987,25.716 U12.26@42,25.728 ; C128.1@40.07,43.545 41.822,43.545 42.5,42.867 U12.99@42.5,41.172 ; U12.10@40.278,34.95 41.396,34.95 41.587,35.141 ; U8.18@41.544,52.525 U8.25@42.238,52.525 ; U8.13@41.544,55.025 U8.13@41.725,55.025 ; U8.19@42.238,51.832 U8.25@42.238,52.525 ; U8.12@42.238,55.718 U8.12@42.238,55.578 ; U8.22@43.738,51.832 43.738,53.102 43.949,53.314 v1(43.488,53.775) ; U8.25@43.999,53.364 44.238,53.125 U8.23@44.238,51.832 ; v1(45.431,55.718) U8.7@44.738,55.718 44.738,55.222 44.661,55.145 44.661,54.948 v1(43.488,53.775) ; v1(48.522,58.906) 48.522,58.867 49.275,58.114 C39.1@49.275,58.025 ; C10.1@51.445,10.299 53.554,10.299 C2.2@53.881,10.626 ; U12.49@53.5,25.728 53.5,26.71 53.735,26.945 54.632,26.945 55.897,25.68 61.301,25.68 61.736,25.245 61.74,25.245 62.267,24.718 C144.1@62.267,24.714 ; TVS1.3@64.714,16.699 64.714,16.097 TVS1.7@65.087,15.724 ; TVS1.7@65.364,15.724 TVS1.2@65.364,16.699 ; v1(65.761,15.723) 66.014,15.976 TVS1.1@66.014,16.699 ; U5.13@5.55,55.025 U5.25@6.062,55.025 ; U5.13@5.55,55.025 5.55,55.522 v1(5.578,55.55) 5.606,55.578 U5.12@6.062,55.578 ; U5.25@6.062,52.525 v1(7.312,53.775) ; U5.25@6.062,55.025 U5.12@6.062,55.578 ; U5.25@6.062,55.025 v1(7.312,53.775) ; U6.13@17.487,55.025 17.487,55.522 v1(17.515,55.55) 17.543,55.578 U6.12@18,55.578 ; U6.13@17.487,55.025 U6.25@18,55.025 ; U6.25@18,52.525 v1(19.25,53.775) ; U6.25@18,55.025 v1(19.25,53.775) ; U6.25@18,55.025 U6.12@18,55.578 ; U7.13@29.874,55.025 29.874,55.522 v1(29.902,55.55) 29.93,55.578 U7.12@30.387,55.578 ; U7.13@29.874,55.025 U7.25@30.387,55.025 ; U7.25@30.387,52.525 v1(31.637,53.775) ; U7.25@30.387,55.025 v1(31.637,53.775) ; U7.25@30.387,55.025 U7.12@30.387,55.578 ; U8.13@41.725,55.025 41.725,55.522 v1(41.753,55.55) 41.781,55.578 U8.12@42.238,55.578 ; U8.13@41.725,55.025 U8.25@42.238,55.025 ; U8.25@42.238,52.525 v1(43.488,53.775) ; U8.25@42.238,55.025 v1(43.488,53.775) ; U8.25@42.238,55.025 U8.12@42.238,55.578
  Top Layer w0.381: J8.5@9.748,42.818 J8.5@10.168,42.818 10.231,42.755 10.231,42.227 10.454,42.004 12.125,42.004 ; R17.2@12.423,63.463 12.423,63.501 12.956,64.035 12.968,64.035 v1(12.972,64.038) ; R18.2@12.423,67.124 v1(13.074,67.124) ; 18.973,43.852 19.357,43.852 19.581,43.629 U17.4@19.581,42.752 ; 30.745,29.5 31.407,30.162 C80.1@31.445,30.162 ; v1(40.665,77.572) 40.669,77.575 41.502,77.575 Q1.3@41.508,77.582 ; v1(40.672,66.91) 40.676,66.914 Q4.3@41.508,66.914 Q4.3@41.515,66.92 ; v1(40.672,70.466) 40.676,70.47 Q3.3@41.508,70.47 Q3.3@41.515,70.476 ; v1(40.672,74.022) 40.676,74.026 Q2.3@41.508,74.026 Q2.3@41.515,74.032 ; U2.9@41.562,12.908 41.577,12.893 U2.6@41.577,10.858 ; R63.1@44.636,73.994 R63.1@44.642,74 45.475,74 v1(45.479,74.004) ; R62.1@44.636,77.55 R62.1@44.642,77.556 45.475,77.556 v1(45.479,77.56) ; D2.2@47.216,15.71 47.216,15.202 D2.2@47.247,15.171 ; v1(53.035,64.211) 53.035,64.206 53.554,63.687 C87.1@53.554,62.497 ; R71.2@55.371,49.67 55.374,49.673 56.224,49.673 v1(56.227,49.676) ; C90.1@57.219,62.497 v1(57.219,63.351) ; C89.1@59.041,48.12 59.068,48.093 59.068,47.317 v1(59.072,47.313) ; v1(60.852,47.313) 60.856,47.317 60.856,48.106 C97.1@60.87,48.12 ; v1(62.702,60.91) R76.2@62.702,60.947 ; R77.2@64.516,49.67 64.736,49.449 64.832,49.449 65.408,48.873 v1@65.422,48.873 ; v1(67.109,58.671) 67.113,58.674 67.244,58.674 67.639,59.069 67.965,59.069 C95.1@68.186,59.29 ; C96.1@68.134,48.12 C96.1@68.186,48.12 ; v1(74.394,30.762) 74.47,30.762 75.158,31.45 J4.S1@75.5,31.45 ; J4.S2@75.5,46.55 76.013,46.037 v1(76.013,45.845)
  Bottom Layer w0.254: DAC1.7@7.832,57.725 7.832,58.419 7.926,58.419 8.316,58.809 8.534,58.809 v1(8.562,58.837) ; U19.1@14.341,34.638 14.325,34.638 14.165,34.797 v1(14.165,35.3) 14.165,35.748 14.325,35.908 U19.2@14.341,35.908 ; DAC2.7@19.77,57.725 19.77,58.419 19.864,58.419 20.254,58.809 20.472,58.809 v1(20.5,58.837) ; DAC3.7@32.157,57.725 32.157,58.419 32.251,58.419 32.641,58.809 32.859,58.809 v1(32.887,58.837) ; v1(42.372,36.192) C130.1@43.652,36.192 ; v1(42.372,39.7) C145.1@43.632,39.7 ; C98.1@45.202,30.855 46.006,30.855 v2(47.029,31.878) ; C92.1@45.202,32.634 46.029,32.634 46.785,33.39 v1(46.785,34.771)
  Bottom Layer w0.381: v1(20.997,69.875) 20.999,69.874 C83.1@21,69.191 C83.1@21,69.191 ; v1(24.997,69.875) v1(24.997,69.875) 24.999,69.192 C84.1@25,69.191 ; v1(28.997,69.875) v1(28.997,69.875) 28.999,69.192 C139.1@29,69.191 ; v1(33.043,69.875) 33.044,69.874 C122.1@33.045,69.191 C122.1@33.045,69.191 ; v1(59.038,60.947) 59.086,60.947 59.3,60.734 59.3,60.685 59.764,60.221 U16.4@59.764,58.353 ; v1(62.715,47.305) C107.1@62.715,48.12 ; C105.1@64.528,62.517 v1(64.528,63.32) ; v1(65.43,48.87) 65.434,48.873 65.52,48.873 66.316,49.67 R83.2@66.366,49.67 ; v1(67.158,51.892) 67.161,51.889 67.567,51.889 68.124,51.332 C104.1@68.186,51.332 ; C103.1@68.186,62.517 v1(68.186,63.32)
  other v1: 9.029,5.878 11.029,5.878 13.029,5.878 11.029,7.878 13.029,7.878 15.029,7.878 35.62,9.326 17.376,10.299 29.854,10.318 55.029,11.878 67.029,11.878 23.783,14.193 17.075,14.521 64.973,15.723 75.029,15.878 55.029,17.878 75.029,17.878 77.029,17.878 5.029,19.878 7.029,19.878 9.029,19.878 13.029,19.878 15.029,19.878 21.029,19.878 23.029,19.878 27.029,19.878 31.029,19.878 33.029,19.878 35.029,19.878 73.029,19.878 77.029,19.878 21.036,21.565 23.036,21.565 5.029,21.878 7.029,21.878 9.029,21.878 13.029,21.878 15.029,21.878 27.029,21.878 29.029,21.878 31.029,21.878 33.029,21.878 35.029,21.878 45.854,22.908 5.029,23.878 7.029,23.878 9.029,23.878 13.029,23.878 15.029,23.878 65.029,23.878 75.029,23.878 5.029,25.878 7.029,25.878 9.029,25.878 13.029,25.878 15.029,25.878 17.029,25.878 27.029,25.878 39.029,25.878 67.029,25.878 52.835,27.297 5.029,27.878 7.029,27.878 47.029,27.878 67.029,27.878 69.029,27.878 73.029,27.878 77.029,27.878 52.835,29.08 29.25,29.187 67.029,29.385 5.029,29.878 13.029,29.878 43.029,29.878 47.029,29.878 49.029,29.878 69.029,29.878 73.029,29.878 75.029,29.878 77.029,29.878 52.835,30.855 38.478,31.207 5.029,31.878 49.029,31.878 69.029,31.878 73.029,31.878 52.835,32.634 8.691,33.147 32.167,33.362 5.029,33.878 13.029,33.878 35.029,33.878 75.029,33.878 77.029,33.878 52.835,34.598 62.693,35.329 5.029,35.878 49.029,35.878 51.029,35.878 53.029,35.878 75.029,35.878 77.029,35.878 5.029,37.878 61.029,37.878 75.029,37.878 77.029,37.878 69.366,38.53 10.588,38.756 49.695,39.744 53.029,39.878 71.029,39.878 75.029,39.878 77.029,39.878 69.366,40.759 12.724,41.395 39.029,41.878 41.029,41.878 55.029,41.878 57.029,41.878 71.029,41.878 75.029,41.878 77.029,41.878 13.674,42.369 4.664,42.662 7.221,42.895 20.691,43.553 75.029,43.878 77.029,43.878 7.221,44.118 17.056,44.475 47.561,44.858 74.992,45.866 67.029,45.878 71.029,45.878 73.029,45.878 45.075,47.668 49.029,47.878 71.029,47.878 73.029,47.878 4.514,48.291 9.55,48.336 47.957,48.9 71.029,49.878 73.029,49.878 75.029,49.878 4.562,51.832 6.477,53.775 18.415,53.775 30.801,53.775 42.652,53.775 59.029,53.878 61.029,53.878 65.029,53.878 7.312,54.534 19.25,54.534 31.637,54.534 43.488,54.534 11.312,54.75 23.25,54.75 35.637,54.75 47.488,54.75 57.029,55.878 59.029,55.878 61.029,55.878 65.029,55.878 61.029,57.878 44.661,59.235 39.989,59.644 28.001,59.878 29.029,59.878 61.029,59.878 26.001,59.95 4.283,61.608 26.001,61.882 28.001,61.882 33.029,61.878 43.029,61.878 45.029,61.878 4.283,62.599 26.001,63.625 28.001,63.625 41.029,63.878 43.029,63.878 55.029,63.878 57.029,63.878 61.029,63.878 63.029,63.878 65.029,63.878 3.559,64.512 4.231,65.503 9.029,65.878 45.029,65.878 49.029,65.878 59.029,65.878 61.029,65.878 63.029,65.878 65.029,65.878 69.029,65.878 44.642,66.888 35.029,67.878 37.029,67.878 39.029,67.878 49.029,67.878 51.029,67.878 57.029,67.878 59.029,67.878 61.029,67.878 63.029,67.878 67.029,67.878 69.029,67.878 49.029,69.878 51.029,69.878 61.029,69.878 63.029,69.878 65.029,69.878 69.029,69.878 44.642,70.444 5.029,71.878 19.029,71.878 23.029,71.878 47.029,71.878 49.029,71.878 51.029,71.878 53.029,71.878 55.029,71.878 57.029,71.878 59.029,71.878 61.029,71.878 63.029,71.878 65.029,71.878 67.029,71.878 69.029,71.878 3.579,73.013 19.029,73.878 21.029,73.878 23.029,73.878 25.029,73.878 27.029,73.878 29.029,73.878 31.029,73.878 33.029,73.878 37.029,73.878 49.029,73.878 51.029,73.878 53.029,73.878 55.029,73.878 57.029,73.878 59.029,73.878 61.029,73.878 63.029,73.878 65.029,73.878 69.029,73.878 4.251,74.003 19.029,75.878 21.029,75.878 23.029,75.878 25.029,75.878 27.029,75.878 29.029,75.878 31.029,75.878 33.029,75.878 35.029,75.878 37.029,75.878 47.029,75.878 49.029,75.878 51.029,75.878 53.029,75.878 55.029,75.878 57.029,75.878 59.029,75.878 61.029,75.878 63.029,75.878 65.029,75.878 67.029,75.878 69.029,75.878 3.572,76.01 4.244,77.001 5.029,77.878 19.029,77.878 21.029,77.878 23.029,77.878 25.029,77.878 27.029,77.878 29.029,77.878 31.029,77.878 33.029,77.878 35.029,77.878 37.029,77.878 39.029,77.878 47.029,77.878 49.029,77.878 51.029,77.878 53.029,77.878 55.029,77.878 57.029,77.878 59.029,77.878 61.029,77.878 63.029,77.878 65.029,77.878 67.029,77.878 69.029,77.878 7.029,79.878 19.029,79.878 21.029,79.878 23.029,79.878 25.029,79.878 27.029,79.878 29.029,79.878 31.029,79.878 33.029,79.878 35.029,79.878 37.029,79.878 39.029,79.878 41.029,79.878 43.029,79.878 45.029,79.878 47.029,79.878 49.029,79.878 51.029,79.878 53.029,79.878 55.029,79.878 57.029,79.878 59.029,79.878 61.029,79.878 63.029,79.878 65.029,79.878 67.029,79.878 69.029,79.878 71.029,79.878 73.029,79.878 75.029,79.878 77.029,79.878 7.029,81.878 9.029,81.878 11.029,81.878 13.029,81.878 15.029,81.878 17.029,81.878 19.029,81.878 21.029,81.878 23.029,81.878 25.029,81.878 27.029,81.878 29.029,81.878 31.029,81.878 33.029,81.878 35.029,81.878 37.029,81.878 39.029,81.878 41.029,81.878 43.029,81.878 45.029,81.878 47.029,81.878 49.029,81.878 51.029,81.878 53.029,81.878 55.029,81.878 57.029,81.878 59.029,81.878 61.029,81.878 63.029,81.878 65.029,81.878 67.029,81.878 69.029,81.878 71.029,81.878 73.029,81.878 75.029,81.878 77.029,81.878
GND_CAM: J1.4 J1.8 J1.10 J1.12 J1.22 J1.25 J1.29 J1.31 J1.33 J3.1 J3.14
  other v1: 24.5,3.556 30.522,3.603 71.457,54.309 73.025,54.311 74.282,54.896 74.303,57.482 74.303,59.982 71.457,70.559 73.025,70.561
HEATER_1_B: J5.9 Q1.2 | length 26
  Top Layer w0.254: J5.9@19,67.65 19,69.789 22.012,72.801 36.936,72.801 37.753,73.617 37.753,75.376 38.66,76.284 38.66,76.309 38.983,76.632 Q1.2@39.008,76.632
HEATER_2_B: J5.11 Q2.2 | length 19.9
  Top Layer w0.254: J5.11@23,67.65 23,69.872 25.145,72.017 38.49,72.017 38.866,72.394 38.866,72.934 Q2.2@39.008,73.076
HEATER_3_B: J5.13 Q3.2 | length 16.3
  Top Layer w0.254: J5.13@27,67.65 27,69.871 28.399,71.27 38.546,71.27 38.919,70.897 38.919,69.609 Q3.2@39.008,69.52
HEATER_4_B: J5.15 Q4.2 | length 13.9
  Top Layer w0.254: J5.15@31,67.65 31.002,67.652 31.002,69.861 31.697,70.556 36.947,70.556 37.753,69.751 37.753,67.219 38.66,66.312 38.66,66.287 38.983,65.964 Q4.2@39.008,65.964
HEATER_PWM4_1: R58.1 U12.59 | length 65.7
  Top Layer w0.254: R58.1@44.642,75.656 44.642,75.606 46.387,73.862 46.387,68.849 47.188,68.048 47.188,65.697 51.787,61.099 51.787,46.638 54.559,43.866 62.871,43.866 64.881,41.856 64.881,32.949 63.382,31.45 U12.59@55.722,31.45
HEATER_PWM4_2: R59.1 U12.60 | length 61
  Top Layer w0.254: R59.1@44.642,72.1 44.642,72.05 45.655,71.038 45.655,68.503 46.482,67.676 46.482,65.269 51.351,60.401 51.351,46.414 54.407,43.358 62.557,43.358 64.33,41.584 64.33,33.131 63.149,31.95 U12.60@55.722,31.95
HEATER_PWM4_3: R60.1 U12.61 | length 56.3
  Top Layer w0.254: R60.1@44.642,68.544 44.642,68.494 45.743,67.394 45.743,64.825 50.904,59.665 50.904,46.15 54.13,42.924 62.156,42.924 63.813,41.267 63.813,33.333 62.93,32.45 U12.61@55.722,32.45
HEATER_PWM4_4: R61.1 U12.62 | length 51.6
  Top Layer w0.254: R61.1@44.642,64.988 44.642,64.938 50.5,59.081 50.5,45.868 53.848,42.52 61.697,42.52 63.286,40.93 63.286,33.543 62.693,32.95 U12.62@55.722,32.95
ILIM_1: R23.2 R27.1 U5.4 | length 5
  Top Layer w0.254: U5.4@9.255,54.025 10.175,54.025 10.5,53.7 v1(10.5,51.75) R23.2@11.312,51.75
  Bottom Layer w0.254: v1(10.5,51.75) R27.1@11.312,51.75
ILIM_2: R24.2 R28.1 U6.4 | length 5
  Top Layer w0.254: U6.4@21.193,54.025 22.113,54.025 22.438,53.7 v1(22.438,51.75) R24.2@23.25,51.75
  Bottom Layer w0.254: v1(22.438,51.75) R28.1@23.25,51.75
ILIM_3: R56.2 R136.1 U7.4 | length 5
  Top Layer w0.254: U7.4@33.58,54.025 34.5,54.025 34.825,53.7 v1(34.825,51.75) R56.2@35.637,51.75
  Bottom Layer w0.254: v1(34.825,51.75) R136.1@35.637,51.75
ILIM_4: R57.2 R137.1 U8.4 | length 5
  Top Layer w0.254: U8.4@45.431,54.025 46.35,54.025 46.675,53.7 v1(46.675,51.75) R57.2@47.488,51.75
  Bottom Layer w0.254: v1(46.675,51.75) R137.1@47.488,51.75
IR_LED_P: C123.2 C124.2 D5.2 J10.1 R102.1 U19.3 U19.4 | length 1.4
  Top Layer w0.381: v1(10.513,37.092) 10.888,37.092 J10.1@11.033,36.947 ; J10.1@10.888,37.141 11.629,37.141 v1(11.65,37.12)
  Bottom Layer w0.381: D5.2@8.282,38.372 D5.2@8.357,38.372
IR_LED_PWM: R103.2 R104.2 U12.39 | length 50
  Top Layer w0.254: U12.39@48.5,25.728 48.502,25.726 48.502,23.955 v1(48.505,23.952)
  Bottom Layer w0.254: R103.2@19.861,42.286 19.855,42.293 19.855,43.615 R104.2@19.848,43.621 19.848,43.671 20.703,44.526 25.275,44.526 26.264,43.538 26.264,27.61 29.921,23.952 v1(48.505,23.952)
IRQ_0: R44.2 R55.2 U12.65 | length 47
  Top Layer w0.254: U12.65@55.722,34.45 55.725,34.446 61.009,34.446 v1(62,33.455)
  Bottom Layer w0.254: R44.2@38.931,14.324 R55.2@37.195,14.324 37.195,17.158 41.347,21.311 57.033,21.311 62,26.277 v1(62,33.455)
IRQ_1: R41.2 R54.1 U12.66 | length 47.6
  Top Layer w0.254: U12.66@55.722,34.95 v1@60.359,34.951
  Bottom Layer w0.254: R41.2@33.723,14.324 R54.1@35.459,14.324 35.459,16.704 40.522,21.768 56.82,21.768 61.248,26.196 61.248,34.063 v1(60.36,34.951)
ITEC_ADC_1: U5.11 U9.2 | length 16.3
  Top Layer w0.254: v1(6.263,56.517) 6.283,56.517 6.562,56.238 U5.11@6.562,55.718
  Bottom Layer w0.254: v1(6.263,56.517) 5.809,56.517 2.953,53.661 2.953,49.135 4.79,47.298 6.495,47.298 7.217,46.577 7.217,45.558 U9.2@7.227,45.547
ITEC_ADC_2: U6.11 U9.6 | length 17.8
  Top Layer w0.254: v1(18.2,56.517) 18.221,56.517 18.5,56.238 U6.11@18.5,55.718
  Bottom Layer w0.254: U9.6@9.227,45.547 9.227,46.311 9.55,46.634 ; 9.55,46.609 11.989,46.609 15.623,50.243 15.623,54.231 16.34,54.948 17.646,54.948 18.2,55.502 v1(18.2,56.517)
ITEC_ADC_3: U7.11 U9.11 | length 31.1
  Top Layer w0.254: v1(30.587,56.517) 30.608,56.517 30.887,56.238 U7.11@30.887,55.718
  Bottom Layer w0.254: U9.11@9.879,42.895 10.857,42.895 12.014,44.052 12.014,45.06 14.91,47.955 25.819,47.955 27.635,49.771 27.635,54.127 28.321,54.813 29.997,54.813 30.587,55.403 v1(30.587,56.517)
ITEC_ADC_4: U8.11 U9.15 | length 47.5
  Top Layer w0.254: v1(42.438,56.517) 42.459,56.517 42.738,56.238 U8.11@42.738,55.718
  Bottom Layer w0.254: U9.15@8.227,41.743 8.227,40.564 8.865,39.927 11.047,39.927 11.328,40.208 11.328,41.334 13.278,43.283 13.278,44.824 14.224,45.771 26.112,45.771 28.602,48.26 37.567,48.26 39.522,50.216 39.522,53.467 40.855,54.8 41.756,54.8 42.438,55.482 v1(42.438,56.517)
LASER_ADC1: C152.2 R126.2 U12.25 | length 34.4
  Top Layer w0.254: v1(38.7,27.165) 38.74,27.165 39.024,27.45 U12.25@40.278,27.45 ; v1(56.711,26.224) 65.196,26.224 67.064,24.356 R126.2@68.585,24.356
  Bottom Layer w0.254: C152.2@37.975,27.165 v1(38.7,27.165) 40.009,27.165 42.054,25.121 54.869,25.121 55.972,26.224 v1(56.711,26.224)
LASER_ADC2: C153.2 R127.2 U12.24 | length 33.7
  Top Layer w0.254: U12.24@40.278,27.95 v1(41.504,27.95) ; v1(56.738,26.945) 65.279,26.945 65.698,26.526 R127.2@68.571,26.526
  Bottom Layer w0.254: C153.2@38,29.076 39.162,29.076 40.288,27.95 v1(41.504,27.95) 43.546,25.908 54.496,25.908 55.533,26.945 v1(56.738,26.945)
LASER_DAC_CS: R123.1 U12.36 | length 32.9
  Top Layer w0.254: v1(46.995,22.883) 46.998,22.885 46.998,25.726 U12.36@47,25.728 ; v1(48.692,22.883) 50.773,20.803 65.288,20.803 66.514,19.577 66.514,14.616 67.032,14.098 67.032,12.966 68.327,11.671 68.327,11.644 68.625,11.346 R123.1@68.625,11.25
  Bottom Layer w0.254: v1(46.995,22.883) v1(48.692,22.883)
LASER_DAC_LATCH: R125.1 U12.51 | length 13.4
  Top Layer w0.254: U12.51@55.722,27.45 65.026,27.45 66.3,28.724 R125.1@68.585,28.724
LASER_SPI4_MISO: R122.2 U12.43 | length 23.6
  Top Layer w0.254: U12.43@50.5,25.728 50.5,23.552 51.954,22.098 65.888,22.098 67.895,20.091 67.895,18.597 68.625,17.867 R122.2@68.625,17.803
LASER_SPI4_MOSI: R124.2 U12.44 | length 21.2
  Top Layer w0.254: U12.44@51,25.728 51.013,25.716 51.013,23.709 52.192,22.53 66.117,22.53 68.625,20.022 R124.2@68.625,19.987
LASER_SPI4_SCK: R120.2 U12.42 | length 26
  Top Layer w0.254: U12.42@50,25.728 50,24.381 50.005,24.376 50.005,23.958 50,23.953 50,23.339 51.673,21.666 65.688,21.666 67.475,19.879 67.475,16.847 R120.2@68.625,15.697
LASER_SW_EXT_CS: R121.1 U12.45 | length 19.6
  Top Layer w0.254: U12.45@51.5,25.728 51.5,23.874 52.413,22.962 66.323,22.962 67.113,22.171 R121.1@68.585,22.171
LASER_SW_INT_CS: R8.1 U12.40 | length 28.7
  Top Layer w0.254: U12.40@49,25.728 49,24.682 48.987,24.669 48.987,24.188 49.01,24.166 49.01,23.685 51.46,21.234 65.495,21.234 67.016,19.714 67.016,15.763 67.759,15.019 67.759,14.35 68.625,13.484 R8.1@68.625,13.434
LED_B: DS6.1 U12.69 | length 69.4
  Top Layer w0.254: U12.69@55.731,36.46 v1@58.99,36.46
  Bottom Layer w0.254: DS6.1@8.623,16.557 9.695,16.557 10.384,17.247 34.671,17.247 39.675,22.25 56.504,22.25 59.784,25.53 59.784,35.665 v1@59,36.449
  other v1: 59,36.45
LED_G: DS5.1 U12.68 | length 67.3
  Top Layer w0.254: U12.68@55.722,35.95 v1@58.302,35.95
  Bottom Layer w0.254: DS5.1@8.623,18.627 8.673,18.627 9.319,17.981 ; 9.331,17.981 9.319,17.981 ; v1(58.293,35.95) 58.882,35.361 58.882,25.199 57.099,23.417 39.419,23.417 33.731,17.729 9.571,17.729 9.319,17.981
NetC3_2: C3.2 U1.7 | length 2.6
  Top Layer w0.254: C3.2@59.617,12.145 59.617,13.265 60.026,13.674 60.697,13.674 60.72,13.697 U1.7@60.72,13.872
NetC4_2: C4.2 U1.10 | length 2.6
  Top Layer w0.254: U1.10@62.12,13.872 62.12,13.697 62.143,13.674 62.845,13.674 63.195,13.323 63.195,12.192 C4.2@63.149,12.145
NetC5_1: C5.1 D2.1 L1.1 U2.8
NetC5_2: C5.2 U2.1
NetC6_1: C6.1 C10.2 | length 1.2
  Top Layer w0.254: C10.2@51.445,11.849 C6.1@51.445,13.09
NetC7_1: C7.1 C11.2 | length 1.9
  Top Layer w0.381: C11.2@31.314,10.412 31.33,10.428 31.33,12.234 C7.1@31.346,12.25
NetC14_2: C14.2 U3.7 | length 2.5
  Top Layer w0.254: C14.2@5.084,70.93 5.084,70.927 5.375,70.635 6.239,70.635 6.781,70.093 6.781,69.799 6.804,69.776 U3.7@6.97,69.776
NetC15_2: C15.2 U3.10 | length 2.4
  Top Layer w0.254: C15.2@5.07,67.269 5.07,67.319 6.127,68.376 U3.10@6.97,68.376
NetC16_1: C16.1 C20.2 | length 1.6
  Top Layer w0.381: C20.2@28.761,11.849 C16.1@28.761,13.411
NetC19_1: C19.1 C21.2 | length 1.6
  Top Layer w0.381: C21.2@18.779,11.849 C19.1@18.779,13.411
NetC22_2: C22.2 R21.2 U5.5 | length 5.2
  Top Layer w0.254: U5.5@9.255,54.525 10.025,54.525 10.3,54.8 10.3,56 10.6,56.3 C22.2@11.312,56.3 R21.2@13.025,56.3
NetC23_2: C23.2 R22.2 U6.5 | length 5.2
  Top Layer w0.254: U6.5@21.193,54.525 21.963,54.525 22.238,54.8 22.238,56 22.538,56.3 C23.2@23.25,56.3 R22.2@24.963,56.3
NetC30_2: C30.2 R33.2 U5.24 | length 5
  Top Layer w0.254: R33.2@8.287,50.275 C30.2@6.587,50.275 6.575,50.287 6.6,50.312 6.6,50.801 6.749,50.95 8.3,50.95 8.562,51.212 U5.24@8.562,51.832
NetC31_2: C31.2 R34.2 U6.24 | length 5
  Top Layer w0.254: R34.2@20.225,50.275 C31.2@18.525,50.275 18.513,50.287 18.538,50.312 18.538,50.801 18.687,50.95 20.238,50.95 20.5,51.212 U6.24@20.5,51.832
NetC34_2: C34.2 R37.2 U7.5 | length 5.2
  Top Layer w0.254: U7.5@33.58,54.525 34.35,54.525 34.625,54.8 34.625,56 34.925,56.3 C34.2@35.637,56.3 R37.2@37.35,56.3
NetC35_2: C35.2 R39.2 U8.5 | length 5.2
  Top Layer w0.254: U8.5@45.431,54.525 46.2,54.525 46.475,54.8 46.475,56 46.775,56.3 C35.2@47.488,56.3 R39.2@49.2,56.3
NetC42_2: C42.2 R148.2 U7.24 | length 5
  Top Layer w0.254: R148.2@32.612,50.275 C42.2@30.912,50.275 30.9,50.287 30.925,50.312 30.925,50.801 31.074,50.95 32.625,50.95 32.887,51.212 U7.24@32.887,51.832
NetC43_2: C43.2 R150.2 U8.24 | length 5
  Top Layer w0.254: R150.2@44.463,50.275 C43.2@42.763,50.275 42.751,50.287 42.776,50.312 42.776,50.801 42.924,50.95 44.476,50.95 44.738,51.212 U8.24@44.738,51.832
NetC75_1: C75.1 C78.2 | length 1.4
  Top Layer w0.254: C78.2@35.382,27.317 C75.1@35.382,28.675
NetC75_2: C75.2 C76.2 L7.2 U12.20 U12.21 | length 9.3
  Top Layer w0.254: L7.2@33.401,28.917 33.574,29.09 33.764,29.09 34.219,29.545 34.717,29.545 35.087,29.915 35.087,29.934 35.378,30.225 C75.2@35.382,30.225 C76.2@37.236,30.225 37.275,30.187 37.944,30.187 38.446,29.685 38.783,29.685 ; 38.782,29.685 39.047,29.95 U12.20@40.278,29.95 ; 38.8,29.702 39.052,29.45 U12.21@40.278,29.45
NetC76_1: C76.1 C79.2 | length 1.4
  Top Layer w0.254: C79.2@37.211,27.317 37.224,27.33 37.224,28.662 C76.1@37.236,28.675
NetC77_1: C77.1 C80.2 | length 1.3
  Top Layer w0.254: C77.1@31.445,27.317 C80.2@31.445,28.612
NetC81_2: C81.2 U12.48 | length 2.9
  Top Layer w0.254: U12.48@53,25.728 53,24.562 53.052,24.511 v1(53.052,24.471)
  Bottom Layer w0.254: v1(53.052,24.471) 53.091,24.471 53.365,24.197 C81.2@54.578,24.197
NetC82_2: C82.2 U12.73 | length 3
  Top Layer w0.254: U12.73@55.722,38.45 56.724,38.45 57.409,37.764 C82.2@58.475,37.764
NetC85_1: C85.1 C87.2 | length 1.7
  Top Layer w0.381: C85.1@53.554,59.29 C87.2@53.554,60.947
NetC86_1: C86.1 C88.2 | length 1.7
  Top Layer w0.381: C88.2@53.554,52.877 C86.1@53.554,54.533
NetC89_2: C89.2 R68.2 U13.3 | length 5.1
  Top Layer w0.254: R68.2@57.215,49.685 C89.2@59.026,49.685 ; U13.3@58.547,52.556 58.547,49.834 58.877,49.834 C89.2@59.026,49.685 ; C89.2@59.041,49.67 C89.2@59.026,49.685
NetC90_2: C90.2 R69.2 U13.5 | length 6.2
  Top Layer w0.254: C90.2@57.219,60.947 57.464,60.702 57.635,60.702 58.264,60.072 59.827,60.072 U13.5@59.827,58.217 ; 59.827,60.036 60.44,60.649 60.476,60.649 60.774,60.947 R69.2@60.87,60.947
NetC93_1: C93.1 C95.2 | length 1.7
  Top Layer w0.381: C93.1@68.186,56.083 C95.2@68.186,57.74
NetC94_1: C94.1 C96.2 | length 1.7
  Top Layer w0.381: C96.2@68.186,49.67 C94.1@68.186,51.327
NetC97_2: C97.2 R74.2 U14.5 | length 4.7
  Top Layer w0.254: C97.2@60.87,49.67 62.015,49.67 ; U14.5@61.976,52.557 61.976,49.709 62.015,49.67 ; R74.2@62.687,49.67 62.015,49.67
NetC99_2: C99.2 R75.2 U14.3 | length 5.2
  Top Layer w0.254: U14.3@63.246,58.207 63.246,59.694 64.499,60.947 R75.2@64.534,60.947 ; R75.2@64.534,60.91 66.342,60.91 C99.2@66.379,60.947
NetC101_1: C101.1 C103.2 | length 1.7
  Bottom Layer w0.381: C101.1@68.186,59.305 C103.2@68.186,60.967
NetC102_1: C102.1 C104.2 | length 1.7
  Bottom Layer w0.381: C104.2@68.186,52.882 C102.1@68.186,54.543